# EAGLE board Sunrise_Alarm_Clock (EAGLE 9.6.2)
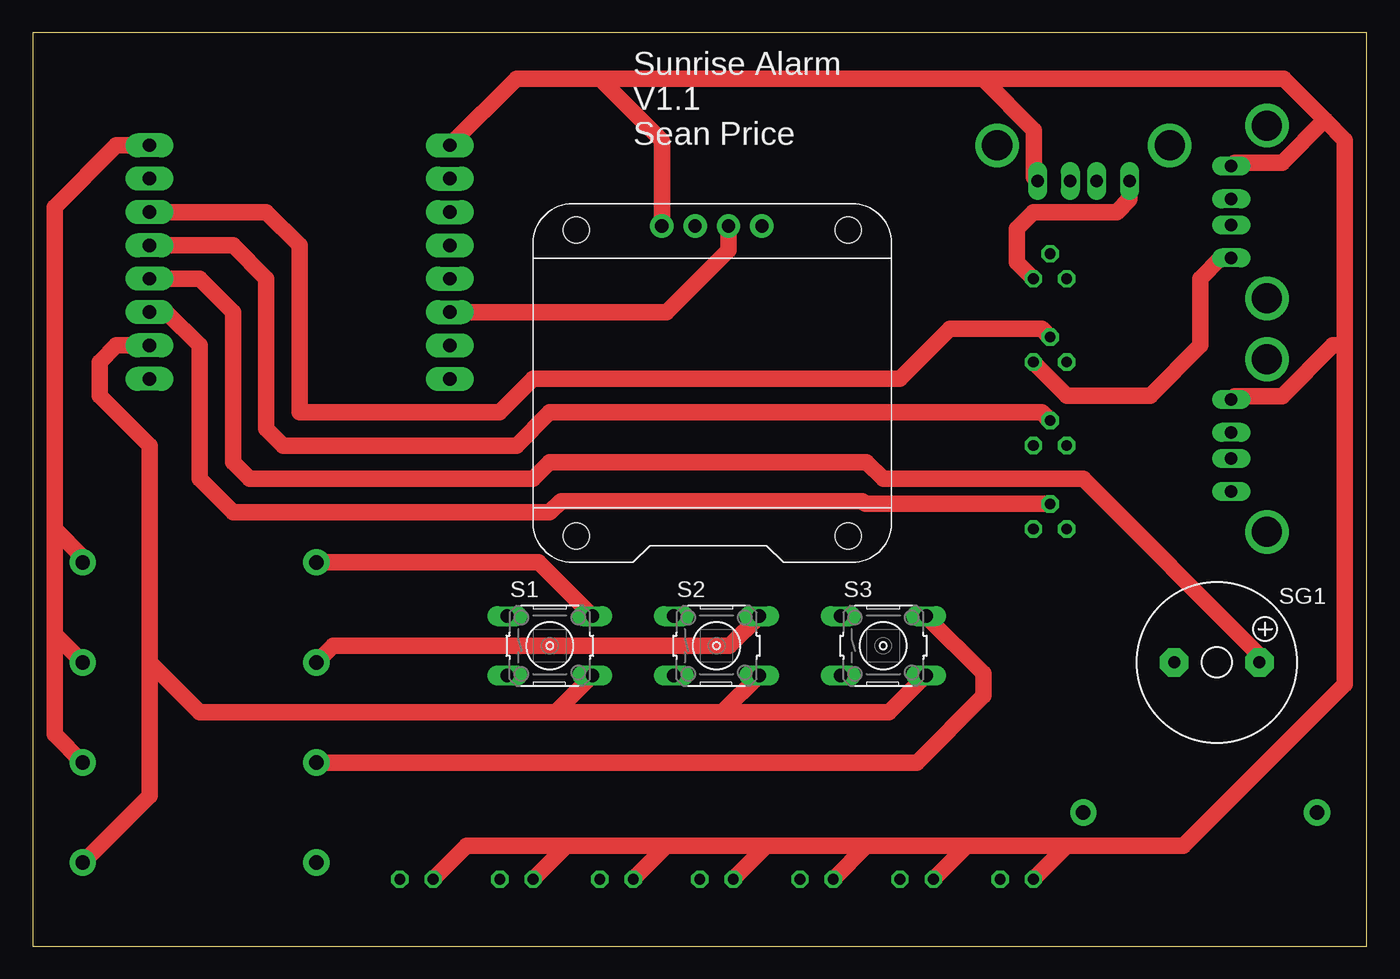
[diagram p0: board, top side]
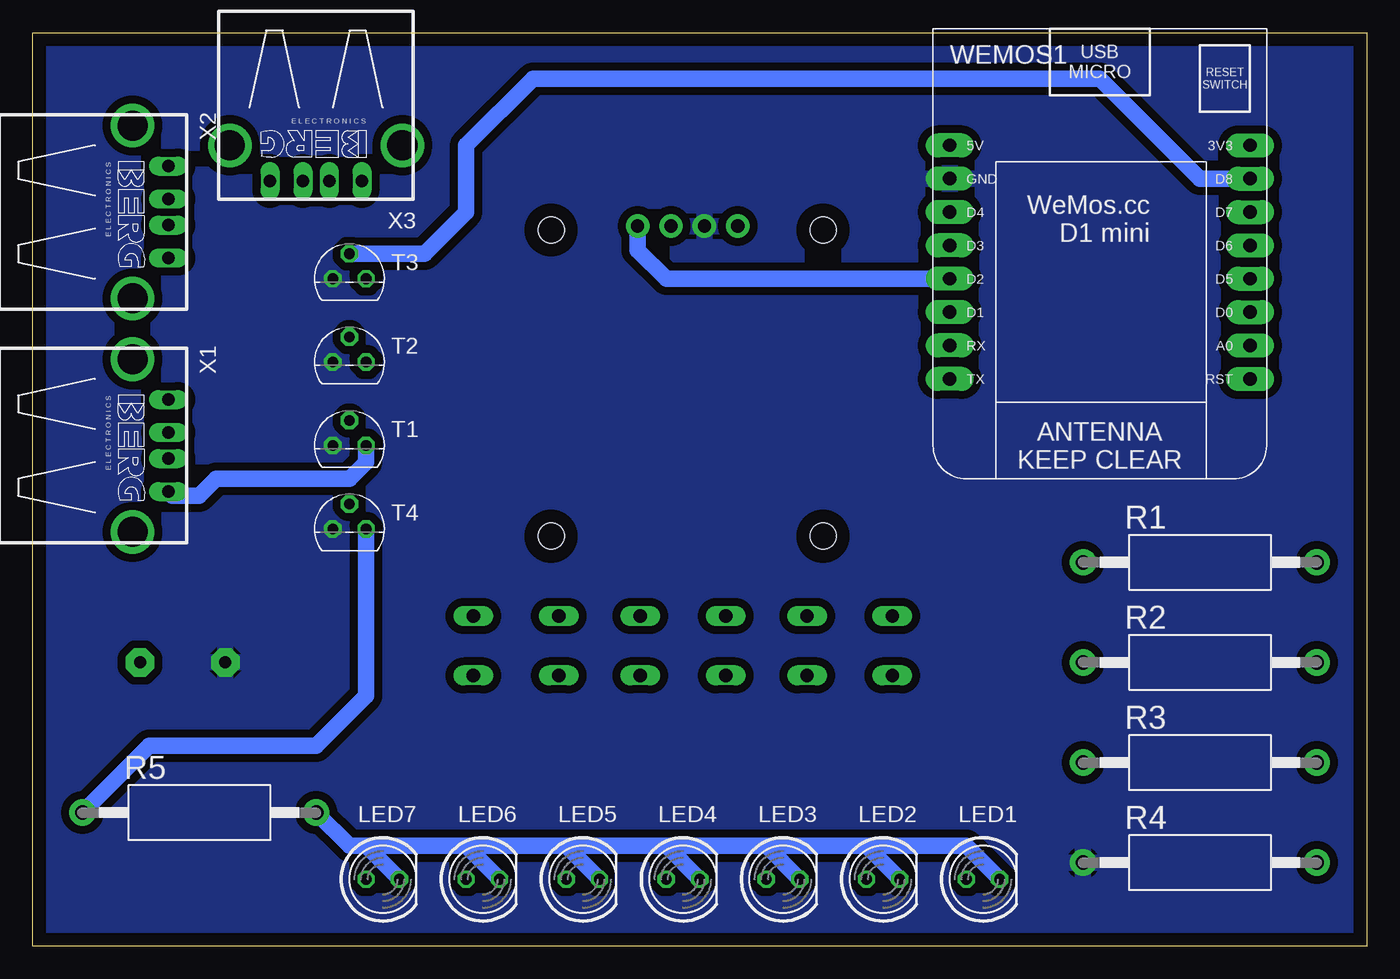
[diagram p1: board, bottom side, seen from below]

Size 101.58 x 69.52 mm. Coordinates in mm from the lower left corner, seen from the top.
Outline: 0,0 101.58,0 101.58,69.52 0,69.52 0,0
Copper layers (1*16): Top 0.035mm / dielectric 1.5mm / Bottom 0.035mm
Design rules "default": minimum track width 6mil, minimum drill 0.35mm, track to track 6mil, track to pad 6mil, pad to pad 6mil, via to via 6mil, smd to smd 6mil, copper to edge 40mil, drill to drill 6mil, minimum pad ring 10mil, minimum via ring 8mil, stop-mask expansion 4mil, vias tented up to drill 0mil, thermal gap 10mil

## Footprints (pad centres in the part's own frame; a part is rotated, then mirrored left to right if it is on the bottom)
LED5MM = drill 0.813 octagon: A -1.27,0; K 1.27,0
AC01 = drill 1.1 pad 2: 1 -8.9,0; 2 8.9,0
B3F-10XX = drill 1.016 long: 1 -3.251,2.261; 2 3.251,2.261; 3 -3.251,-2.261; 4 3.251,-2.261
F/QMX = drill 0.914 pad 2.159 octagon: + 3.251,0; - -3.251,0
TO92 = drill 0.813 octagon: 1 1.27,0; 2 0,1.905; 3 -1.27,0
OLED_0.96_I2C = drill 1 pad 1.778: GND -1.63,11.63; SCL 0.91,11.63; SDA 3.45,11.63; VCC -4.17,11.63 | hole 2: -10.67,-11.97; 10.03,-11.97; 10.03,11.33; -10.67,11.33
WEMOS-D1-MINI = drill 1.016 pad 1.829 long: 3V3 -10.16,-10.16; 5V 12.7,-10.16; A0 -10.16,5.08; D0 -10.16,2.54; D1 12.7,2.54; D2 12.7,0; D3 12.7,-2.54; D4 12.7,-5.08; D5 -10.16,0; D6 -10.16,-2.54; D7 -10.16,-5.08; D8 -10.16,-7.62; GND 12.7,-7.62; RESET -10.16,7.62; RX 12.7,5.08; TX 12.7,7.62
PN87520-S = drill 0.95 long: 1 -3.5,2.71; 2 -1,2.71; 3 1,2.71; 4 3.5,2.71 | drill 2.3 pad 2.9: S1 -6.57,0; S2 6.57,0

## Placement (x,y rotation side)
LED1  [LED5MM]  29.21,5.08 0 bottom
LED2  [LED5MM]  36.83,5.08 0 bottom
LED3  [LED5MM]  44.45,5.08 0 bottom
LED4  [LED5MM]  52.07,5.08 0 bottom
LED5  [LED5MM]  59.69,5.08 0 bottom
LED6  [LED5MM]  67.31,5.08 0 bottom
LED7  [LED5MM]  74.93,5.08 0 bottom
R1  4.7k  [AC01]  12.7,29.21 0 bottom
R2  10k  [AC01]  12.7,21.59 0 bottom
R3  22k  [AC01]  12.7,13.97 0 bottom
R4  10k  [AC01]  12.7,6.35 0 bottom
R5  220  [AC01]  88.9,10.16 0 bottom
S1  [B3F-10XX]  39.37,22.86 0 top
S2  [B3F-10XX]  52.07,22.86 0 top
S3  [B3F-10XX]  64.77,22.86 0 top
SG1  F/QMX  [F/QMX]  90.17,21.59 0 top
T1  2N3904  [TO92]  77.47,38.1 0 bottom
T2  2N3904  [TO92]  77.47,44.45 0 bottom
T3  2N3904  [TO92]  77.47,50.8 0 bottom
T4  2N3904  [TO92]  77.47,31.75 0 bottom
U$1  OLED_0.96_I2C  [OLED_0.96_I2C]  52.07,43.18 0 top
WEMOS1  [WEMOS-D1-MINI]  19.05,50.8 180 bottom
X1  PN87520-S  [PN87520-S]  93.98,38.1 270 bottom
X2  PN87520-S  [PN87520-S]  93.98,55.88 270 bottom
X3  PN87520-S  [PN87520-S]  80.01,60.96 180 bottom

## Library data of the parts
LED1-LED7 = led
R1-R5 = resistor-power; OC_FARNELL: unknown; OC_NEWARK: unknown
S1-S3 = switch-omron; MPN: B3F-1000; OC_FARNELL: 176432; OC_NEWARK: 36M3542
SG1 = buzzer; OC_FARNELL: unknown; OC_NEWARK: unknown
T1-T4 = transistor
U$1 = tft_1_8_1_44_oled_0_96
WEMOS1 = esp8266modules
X1-X3 = con-berg; OC_FARNELL: unknown; OC_NEWARK: unknown

## Nets
3V3: R1.2 R2.2 R3.2 WEMOS1.3V3
A0: R4.2 S1.4 S2.4 S3.4 WEMOS1.A0
D0: T4.2 WEMOS1.D0
D5: SG1.+ WEMOS1.D5
D6: T1.2 WEMOS1.D6
D7: T2.2 WEMOS1.D7
D8: T3.2 WEMOS1.D8
GND: R4.1 SG1.- T1.3 T2.3 T3.3 T4.3 U$1.GND WEMOS1.GND
N$1: T3.1 X3.4
N$5: T2.1 X2.4
N$6: T1.1 X1.4
N$8: R3.1 S3.2
N$9: R2.1 S2.2
N$11: R1.1 S1.2
N$14: R5.1 T4.1
N$18: LED1.K LED2.K LED3.K LED4.K LED5.K LED6.K LED7.K R5.2
SCL: U$1.SCL WEMOS1.D1
SDA: U$1.SDA WEMOS1.D2
VCC: LED1.A LED2.A LED3.A LED4.A LED5.A LED6.A LED7.A U$1.VCC WEMOS1.5V X1.1 X2.1 X3.1

## Tracks (layer width: path | path; a pad name or v marks a point on that pad's centre or on a via)
3V3
  Top 1.27: WEMOS1.3V3 6.35,60.96 1.65,56.26 1.65,31.75 | R3.2 1.65,16.12 1.65,23.74 | 1.65,31.75 1.65,23.74 | R2.2 1.65,23.74 | R1.2 3.8,29.6 1.65,31.75
A0
  Top 1.27: R4.2 8.89,11.44 8.89,21.59 | S3.4 65.2,17.78 52.5,17.78 | 8.89,21.59 12.7,17.78 39.8,17.78 | 52.5,17.78 39.8,17.78 | S1.4 39.8,17.78 | S2.4 52.5,17.78 | WEMOS1.A0 6.35,45.72 5.08,44.45 5.08,41.91 8.89,38.1 8.89,21.59
D0
  Top 1.27: WEMOS1.D0 10.16,48.26 12.7,45.72 12.7,35.56 15.24,33.02 39.37,33.02 40.21,33.86 63.2,33.86 63.4,33.66 T4.2
D5
  Top 1.27: SG1.+ 93.42,22.15 80.01,35.56 64.77,35.56 63.5,36.83 39.37,36.83 38.1,35.56 16.51,35.56 15.24,36.83 15.24,48.26 12.7,50.8 WEMOS1.D5
D6
  Top 1.27: WEMOS1.D6 11.43,53.34 15.24,53.34 17.78,50.8 17.78,46.99 17.78,39.37 19.05,38.1 36.83,38.1 39.37,40.64 76.83,40.64 T1.2
D7
  Top 1.27: T2.2 76.83,46.99 69.85,46.99 66.04,43.18 38.1,43.18 35.56,40.64 20.32,40.64 20.32,53.34 17.78,55.88 WEMOS1.D7
D8
  Bottom 1.27: WEMOS1.D8 12.7,58.42 20.32,66.04 63.5,66.04 68.58,60.96 68.58,55.88 71.75,52.7 T3.2
GND
  pour Bottom (isolate 0.61): 0,69.85 101.6,69.85 101.6,0 0,0
N$1
  Top 1.27: T3.1 74.93,52.07 74.93,54.61 76.2,55.88 82.55,55.88 83.51,56.84 X3.4
N$5
  Top 1.27: T2.1 78.74,41.91 85.09,41.91 88.9,45.72 88.9,50.8 90.48,52.38 X2.4
N$6
  Bottom 1.27: T1.1 76.2,36.83 77.47,35.56 87.63,35.56 88.9,34.29 90.96,34.29 X1.4
N$8
  Top 1.27: R3.1 67.31,13.97 72.39,19.05 72.39,20.75 S3.2
N$9
  Top 1.27: R2.1 22.87,22.86 53.06,22.86 S2.2
N$11
  Top 1.27: R1.1 38.53,29.21 S1.2
N$14
  Bottom 1.27: R5.1 92.72,15.24 80.01,15.24 76.2,19.05 T4.1
N$18
  Bottom 1.27: LED1.K 30.48,7.62 38.1,7.62 | 38.1,7.62 45.72,7.62 | 45.72,7.62 53.34,7.62 | 53.34,7.62 60.96,7.62 | 60.96,7.62 68.58,7.62 | 68.58,7.62 76.2,7.62 | 76.2,7.62 77.47,7.62 R5.2 | LED2.K 38.1,7.62 | LED3.K 45.72,7.62 | LED4.K 53.34,7.62 | LED5.K 60.96,7.62 | LED6.K 68.58,7.62 | LED7.K 76.2,7.62
SCL
  Top 1.27: WEMOS1.D1 48.26,48.26 52.98,52.98 U$1.SCL
SDA
  Bottom 1.27: WEMOS1.D2 53.34,50.8 55.52,52.98 U$1.SDA
VCC
  Top 1.27: LED1.A 33.02,7.62 40.64,7.62 | 40.64,7.62 48.26,7.62 | 48.26,7.62 55.88,7.62 | 55.88,7.62 63.5,7.62 | 63.5,7.62 71.12,7.62 | LED6.A 71.12,7.62 | LED5.A 63.5,7.62 | LED4.A 55.88,7.62 | LED3.A 48.26,7.62 | LED2.A 40.64,7.62 | 71.12,7.62 78.74,7.62 | 78.74,7.62 87.63,7.62 99.93,19.92 99.93,45.72 | 99.93,45.72 99.93,61.36 98.42,62.87 | 72.39,66.04 95.25,66.04 98.42,62.87 | LED7.A 78.74,7.62 | 72.39,66.04 43.18,66.04 | 43.18,66.04 36.83,66.04 WEMOS1.5V | U$1.VCC 47.9,61.32 43.18,66.04 | X3.1 76.24,58.52 76.24,62.12 72.39,65.97 72.39,66.04 | X2.1 91.54,59.65 95.14,59.65 98.36,62.87 98.42,62.87 | X1.1 91.54,41.87 95.14,41.87 98.99,45.72 99.93,45.72

## Text on the board
tNames: Sunrise Alarm / V1.1 / Sean Price